# EAGLE board ledboard-r2 (EAGLE 6.1)
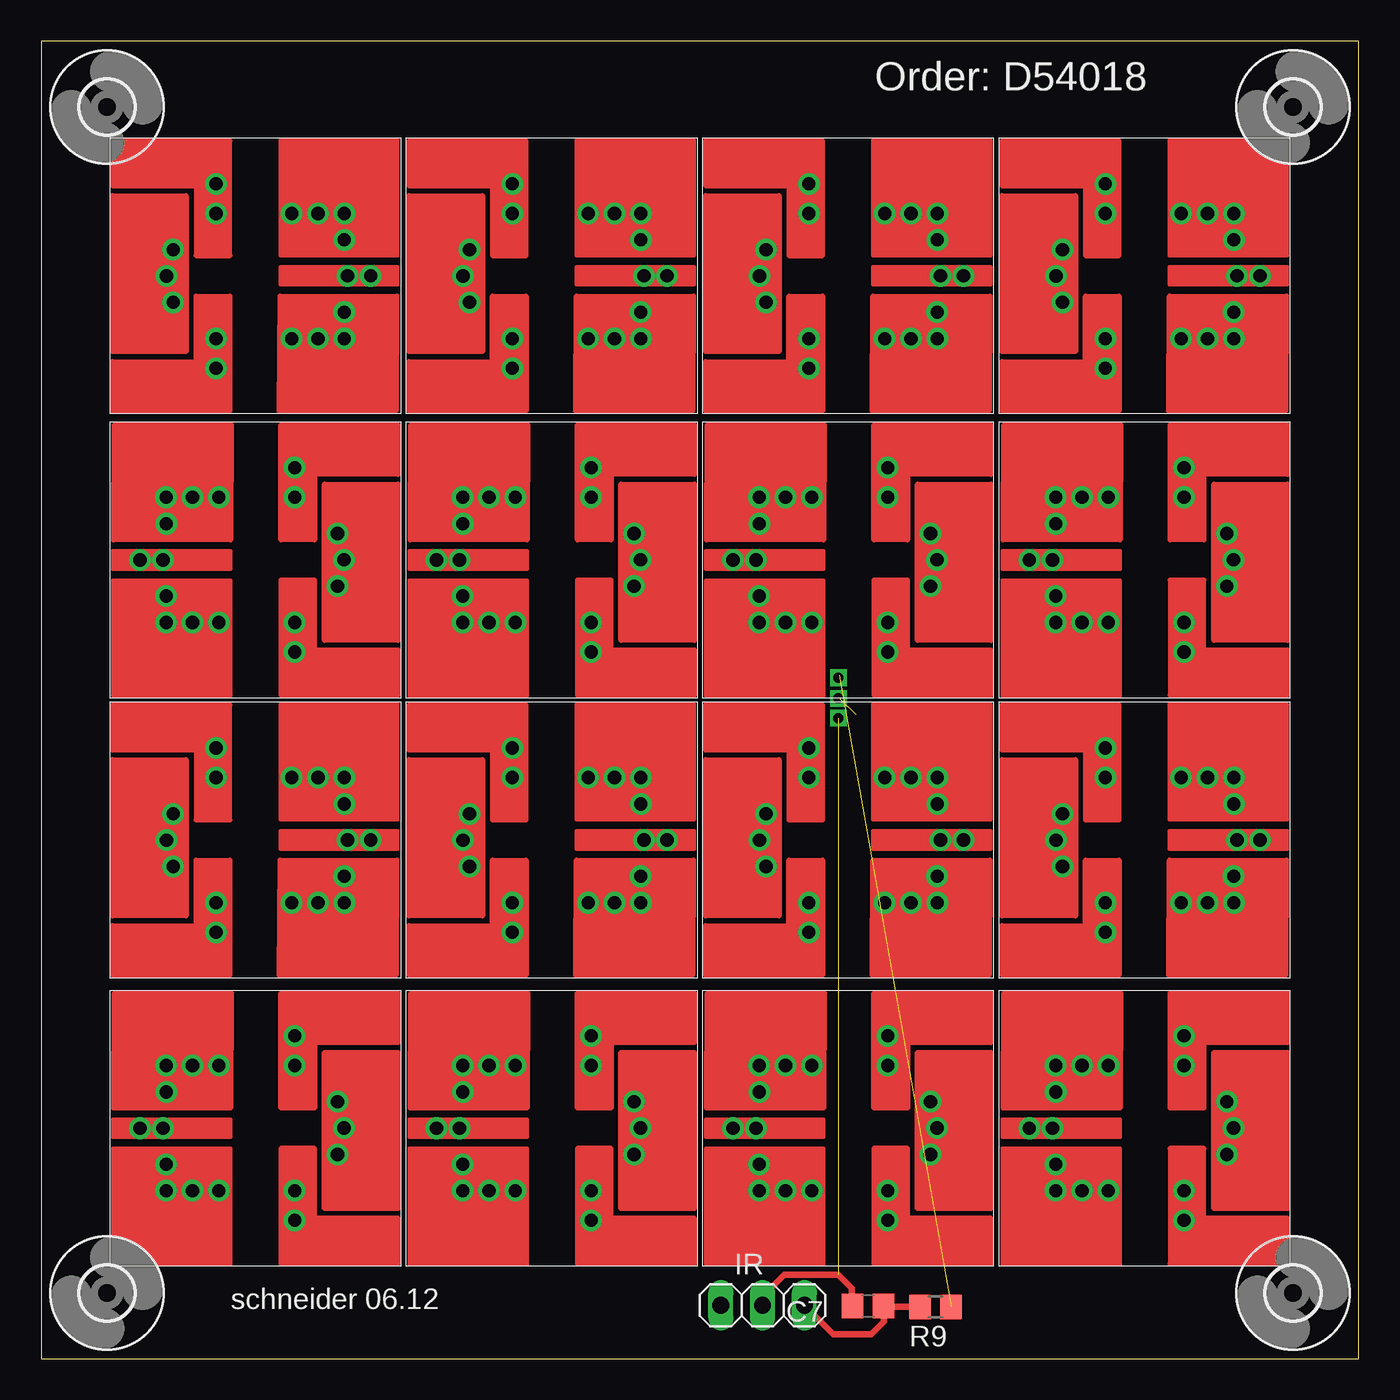
[diagram p0: board, top side]
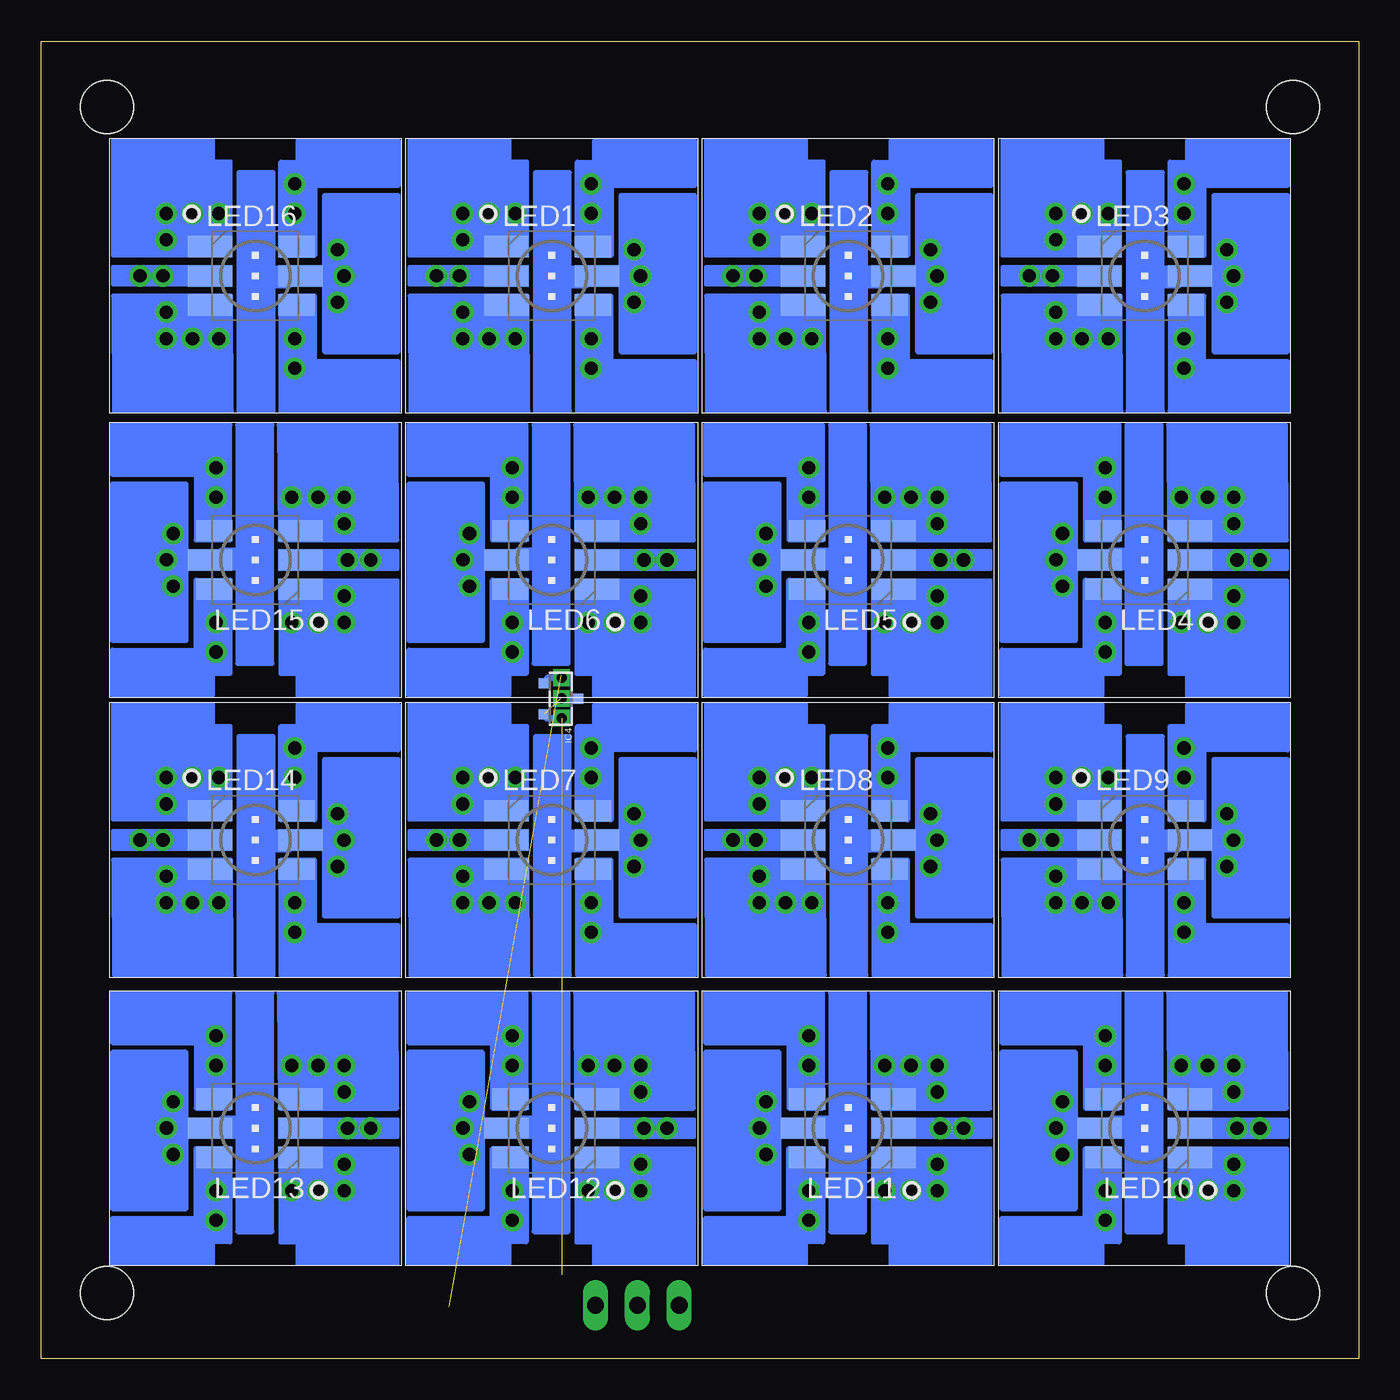
[diagram p1: board, bottom side, seen from below]

Size 80 x 80 mm. Coordinates in mm from the lower left corner, seen from the top.
Outline: 0,0 80,0 80,80 0,80 0,0
Copper layers (1*16): Top 0.035mm / dielectric 1.5mm / Bottom 0.035mm
Design rules: minimum track width 0.2mm, minimum drill 0.3mm, track to track 0.2mm, track to pad 0.2mm, pad to pad 0.2mm, via to via 0.2mm, smd to smd 0.2mm, copper to edge 0.3mm, drill to drill 8mil, minimum pad ring 10mil, minimum via ring 8mil, stop-mask expansion 4mil, vias tented up to drill 0.6mm, thermal gap 10mil

## Footprints (pad centres in the part's own frame; a part is rotated, then mirrored left to right if it is on the bottom)
C0805 = smd 1.3 x 1.5: 1 -0.95,0; 2 0.95,0
3,2 = hole 3.2: 0,0
SOT23-R = smd 0.6 x 0.7: 1 -0.95,-1; 2 0.95,-1; 3 0,1
1X03 = drill 1.016 long: 1 -2.54,0; 2 0,0; 3 2.54,0
PLCC6-DOUBLE = smd 2.7 x 1.3: 1 -2.75,1.775; 2 -2.75,0; 3 -2.75,-1.775; 5 2.75,0 | smd 2.2 x 1.3: 4 2.5,-1.775; 6 2.5,1.775 | drill 0.8: P$1 -5.41,-3.81; P$2 -5.4,-2.2; P$3 -3.81,-3.81; P$4 -2.21,-3.81; P$5 2.39,-3.81; P$6 4.99,1.59; P$7 5.39,-0.01; P$8 4.99,-1.61; P$9 2.39,3.79; P$10 -2.21,3.79; P$11 -3.81,3.79; P$12 -5.41,3.79; P$13 -5.41,2.19; P$14 2.39,-5.61; P$15 2.39,5.59; P$16 -5.6,0; P$17 -7,0
R0805 = smd 1.3 x 1.5: 1 -0.95,0; 2 0.95,0

## Placement (x,y rotation side)
C7  [C0805]  50.2,3.2 0 top
H5  MOUNT-HOLE3.2  [3,2]  4,4 0 top
H6  MOUNT-HOLE3.2  [3,2]  76,4 0 top
H7  MOUNT-HOLE3.2  [3,2]  4,76 0 top
H8  MOUNT-HOLE3.2  [3,2]  76,76 0 top
IC4  [SOT23-R]  48.45,40.08 270 bottom
IR  [1X03]  43.8,3.25 0 top
LED1  CLV6APLCC6-DOUBLE  [PLCC6-DOUBLE]  49,65.75 0 bottom
LED2  CLV6APLCC6-DOUBLE  [PLCC6-DOUBLE]  31,65.75 0 bottom
LED3  CLV6APLCC6-DOUBLE  [PLCC6-DOUBLE]  13,65.75 0 bottom
LED4  CLV6APLCC6-DOUBLE  [PLCC6-DOUBLE]  13,48.5 180 bottom
LED5  CLV6APLCC6-DOUBLE  [PLCC6-DOUBLE]  31,48.5 180 bottom
LED6  CLV6APLCC6-DOUBLE  [PLCC6-DOUBLE]  49,48.5 180 bottom
LED7  CLV6APLCC6-DOUBLE  [PLCC6-DOUBLE]  49,31.5 0 bottom
LED8  CLV6APLCC6-DOUBLE  [PLCC6-DOUBLE]  31,31.5 0 bottom
LED9  CLV6APLCC6-DOUBLE  [PLCC6-DOUBLE]  13,31.5 0 bottom
LED10  CLV6APLCC6-DOUBLE  [PLCC6-DOUBLE]  13,14 180 bottom
LED11  CLV6APLCC6-DOUBLE  [PLCC6-DOUBLE]  31,14 180 bottom
LED12  CLV6APLCC6-DOUBLE  [PLCC6-DOUBLE]  49,14 180 bottom
LED13  CLV6APLCC6-DOUBLE  [PLCC6-DOUBLE]  67,14 180 bottom
LED14  CLV6APLCC6-DOUBLE  [PLCC6-DOUBLE]  67,31.5 0 bottom
LED15  CLV6APLCC6-DOUBLE  [PLCC6-DOUBLE]  67,48.5 180 bottom
LED16  CLV6APLCC6-DOUBLE  [PLCC6-DOUBLE]  67,65.75 0 bottom
R9  [R0805]  54.3,3.15 180 top

## Library data of the parts
C7 R9 = rcl
H5-H8 = holes
IC4 LED1-LED16 = xtort
IR = pinhead

## Nets
+3V3: IC4.1 R9.1
GND: C7.1 IC4.2 IC4.3 IR.2
IR: IR.1
N$1: LED3.3
N$2: LED3.2
N$3: LED3.1
N$65: C7.2 IR.3 R9.2

## Tracks (layer width: path | path; a pad name or v marks a point on that pad's centre or on a via)
+3V3  (via drill 0.6)  (1 unrouted)
  Top 0.406: v48.4,41.35 48.45,41.5
  Bottom 0.406: IC4.1 49.25,41.35 v48.4,41.35
GND  (via drill 0.6)  (2 unrouted)
  Top 0.406: IR.2 43.8,3.8 45.1,5.1 48.4,5.1 49.2,4.3 49.2,3.25 C7.1 | v48.4,40.1 48.4,40.2
  Bottom 0.406: IC4.3 48.48,40.08 v48.4,40.1 | IC4.2 49.3,38.9 v48.4,38.9
N$65
  Top 0.406: IR.3 48.09,1.5 50.4,1.5 51.15,2.25 C7.2 51.2,3.15 R9.2

## Text on the board
tPlace: Order: D54018 | schneider 06.12